# Altium PCB LiPoBattery.PcbDoc
Units mil, origin at the board's own origin, x right, y up, seen from the top; angles counter-clockwise.
Board outline 2662.03 x 2054.69 mil, 2 copper layers (Top Layer, Bottom Layer); 18 components, 9 nets, 54 pads, 12 vias.
Unrouted connection lines stored in the file: 12.
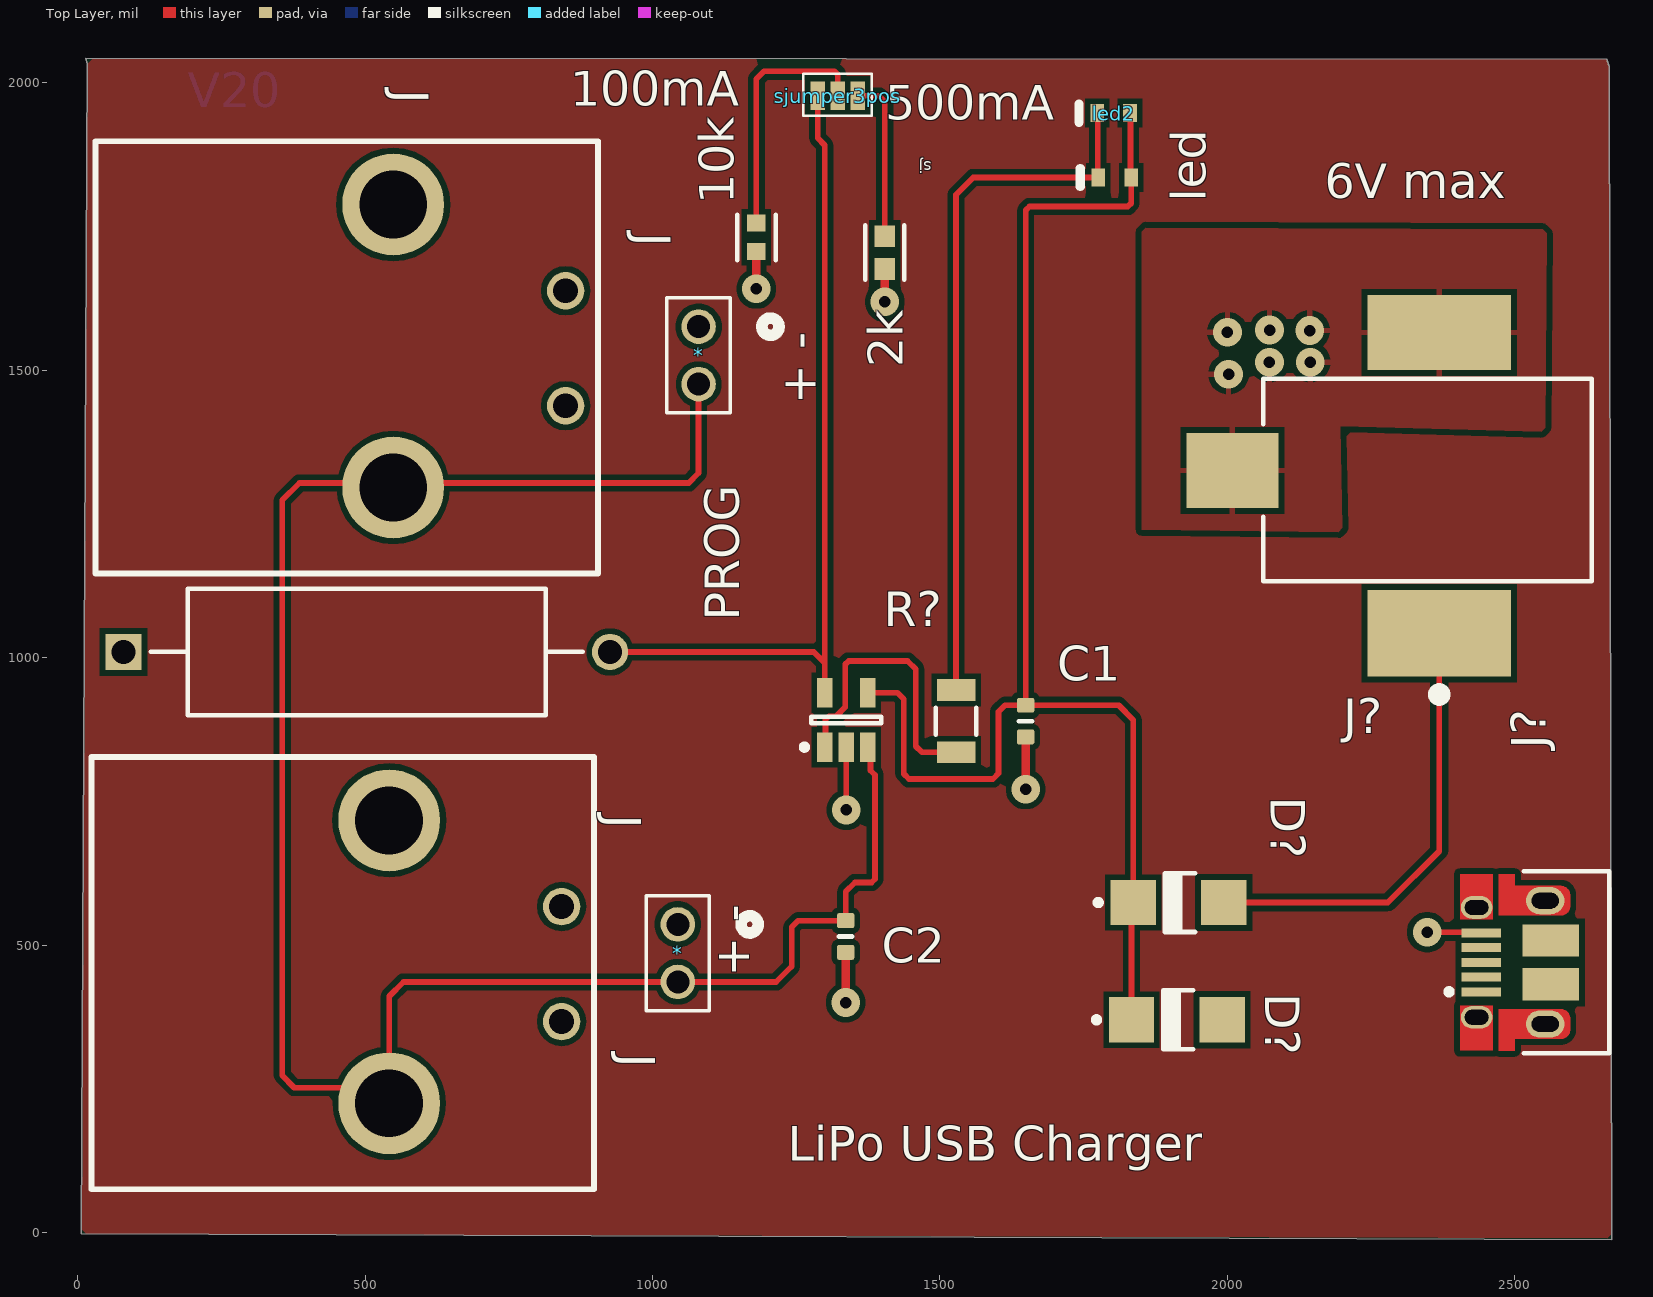
[diagram p0: Top Layer view]
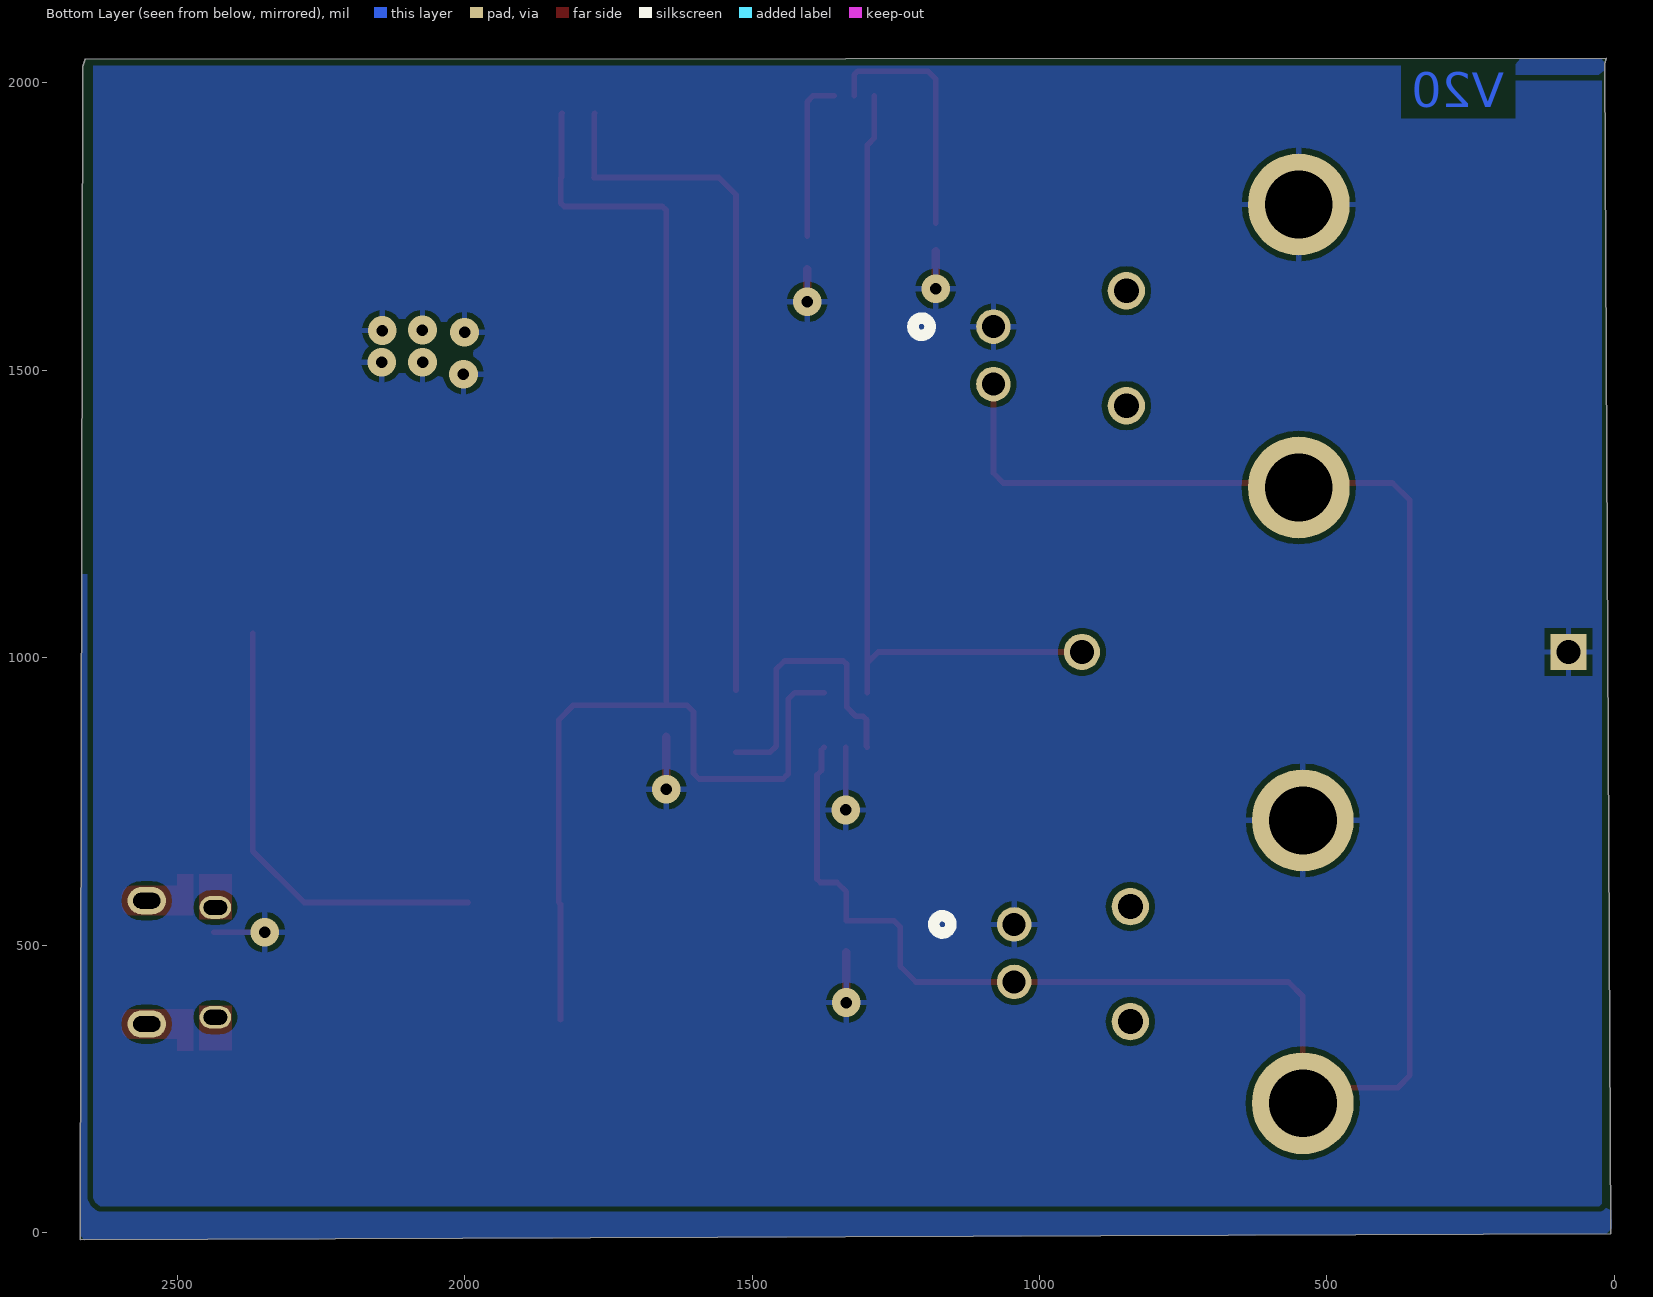
[diagram p1: Bottom Layer view, seen from below]
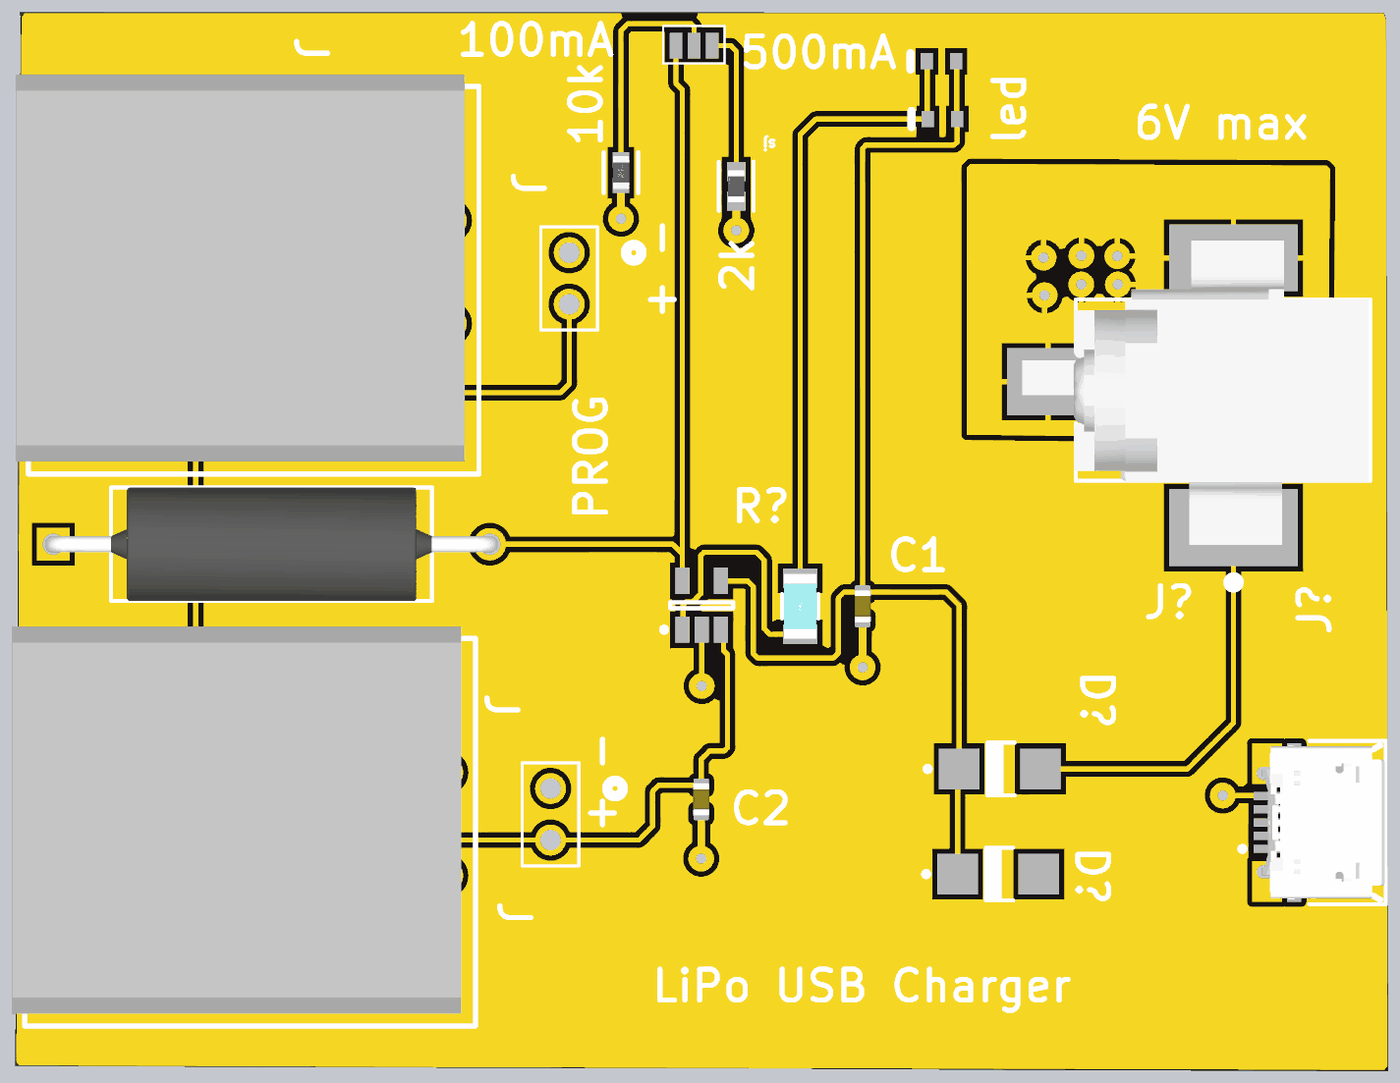
[diagram p2: 3D render of the assembled board from above, using the file's embedded part models]

## Layer stack, top to bottom
Top Solder: solder mask 0.4, Solder Resist, Dk 3.5
Top Layer: signal copper 1.4
Dielectric 1: dielectric 12.6, FR-4, Dk 4.8
Bottom Layer: signal copper 1.4
Bottom Solder: solder mask 0.4, Solder Resist, Dk 3.5

## Board outline
6.04,-2.13 2668.07,-12.53 2663.82,2028.39 2659.88,2041.18 14.21,2042.17 16.48,2033.31

## Design rules (kind name [scope] priority, off if disabled: settings)
Clearance [All] p1: gap=10 ignorepadtopadclearanceinfootprint=TRUE
HoleSize [All] p1: absolutevalues=TRUE maxlimit=150 minlimit=1 maxpercent=80.000 minpercent=20.000
MinimumSolderMaskSliver [All] p1: minsoldermaskwidth=0.5
PolygonConnect [All] p1: connectstyle=Relief reliefconductorwidth=10 reliefentries=4 polygonreliefangle="90 Angle" airgapwidth=10
RoutingVias [All] p1: holewidth=20 width=50 viastyle="Through Hole" minholewidth=10 minwidth=50 maxholewidth=30 maxwidth=50
SilkToSolderMaskClearance [IsPad] p1: minsilkscreentomaskgap=7 clearancetoexposedcopper=TRUE
SolderMaskExpansion [All] p1: expansion=4 istentingtop=FALSE
SupplyNets "Schematic Supply Nets" [InNet('GND')] p1: voltage=0.000
Width [All] p1: maxlimit=20 minlimit=10 preferedwidth=10 checkconnectedcopper=TRUE
27 further rules are at their usual default settings.

## Components (designator, comment, footprint, x,y, rotation, side; value= is the part's Value field where it differs from the comment)
2k "CR0603-JW-202GLF" FP-CR0603-IPC_B 1403.98,1704.49 r90 top
10k "CRGP0603F10K" FP-CRGP0603-IPC_C 1180.55,1731.06 r90 top value=10KΩ
* "2 PIN HEADER" "PCBComponent_1 - duplicate" 1448.17,638.4 r180 top
* "2 PIN HEADER" "PCBComponent_1 - duplicate" 1484.33,1678.03 r180 top
C1 "Capacitor 4.7µF +/-20% 10V 0603" CAPC0603(1608)100_L 1649.06,889.61 r270 top value=4.7µF
C2 "Capacitor 4.7µF +/-20% 10V 0603" CAPC0603(1608)100_L 1336,515 r270 top value=4.7µF
D? "MBRA140T3G" ONSC-SMA-2-403D-02_V 1912,370 r0 top
D? "MBRA140T3G" ONSC-SMA-2-403D-02_V 1915,574 r0 top
J "1-179276-2" PCBComponent_1 542,717 r270 top
J "1-179276-2" PCBComponent_1 549,1788.13 r270 top
J? "10103594-0001LF" FCI-10103594-0001LF_V 2498,470 r90 top
J? "RASM722X" SWIT-RASM722X_V 2188.43,1303.98 r90 top locked
led "red" VISH-TLMX1100_V 1804,1835 r180 top
led2 "red" VISH-TLMX1100_V 1802,1947 r180 top
PROG "CW02B8K200JE12" FP-CW02B-MFG 503,1010 r0 top
R? "RK73H2B3300FT" FP-RK73H2B-IPC_C 1527.99,889.61 r270 top
sjumper3pos "sjumper3pos-Symbol-1" "PCBComponent_1 - duplicate2" 1322.28,1977.2 r180 top
? "MCP73811T-420I/OT" SOT-23-OT5_M 1337.05,891.57 r90 top

## Footprints (in the part's own frame and the unit in brackets; to place one, negate y for a bottom-side part, rotate by r counter-clockwise, add the part's x,y. Pads: shape width x height; smd on the part's side, far side on the other; paste and mask are expansions set on the pad)
CAPC0603(1608)100_L [mm] "Chip Capacitor, Body 1.6x0.8mm, Height 1.0mm, IPC High Density"
  rrect25% 0.66x0.76 smd: 1(-0.7,0) 2(0.7,0)
  silkscreen extent 0,-0.3 0,0.3, body extent -0.8,-0.4 0.8,0.4, height 0.95
FCI-10103594-0001LF_V [mm] "SMD, 5-Leads, Body 8.04x5.62mm, Pitch 0.65 mm"
  rect 0.4x1.75 smd: 1(-1.3,1.435) 2(-0.65,1.435) 3(0,1.435) 4(0.65,1.435) 5(1.3,1.435)
  oval 1x1.4 hole 0.65 slot 1.05 at 90 deg: 6(-2.425,1.64) 7(2.425,1.64)
  oval 1.2x1.7 hole 0.7 slot 1.2 at 90 deg: 8(2.725,-1.39) 9(-2.725,-1.39)
  rect 1.425x2.5 smd: 10(-0.962,-1.64) 11(0.962,-1.64)
  Top Layer region: 3.9,2.37 1.9,2.37 1.9,0.91 3.9,0.91
  Top Layer region: -3.9,0.91 -1.9,0.91 -1.9,2.37 -3.9,2.37
  Top Layer region: 3.375,-0.04 3.375,-2.09 3.373,-2.129 3.369,-2.167 3.365,-2.185 3.359,-2.203 3.348,-2.239 3.329,-2.277 3.308,-2.312 3.284,-2.344 3.258,-2.374 3.227,-2.401 3.194,-2.426 3.158,-2.446 3.121,-2.464 3.08,-2.477 3.049,-2.483 3.012,-2.488 2.975,-2.49 2.475,-2.49 2.432,-2.488 2.391,-2.481 2.351,-2.471 2.312,-2.456 2.28,-2.439 2.249,-2.421 2.217,-2.396 2.19,-2.37 2.164,-2.342 2.143,-2.312 2.121,-2.277 2.105,-2.241 2.093,-2.209 2.088,-2.192 2.084,-2.175 2.08,-2.155 2.076,-2.134 2.075,-2.112 2.075,-2.09 2.075,-0.04 2.075,0.66 3.9,0.66 3.9,-0.04
  Top Layer region: -3.375,-0.04 -3.375,-2.09 -3.373,-2.129 -3.369,-2.167 -3.365,-2.185 -3.359,-2.203 -3.348,-2.239 -3.329,-2.277 -3.308,-2.312 -3.284,-2.344 -3.258,-2.374 -3.227,-2.401 -3.194,-2.426 -3.158,-2.446 -3.121,-2.464 -3.08,-2.477 -3.049,-2.483 -3.012,-2.488 -2.975,-2.49 -2.475,-2.49 -2.432,-2.488 -2.391,-2.482 -2.351,-2.471 -2.312,-2.456 -2.28,-2.439 -2.249,-2.421 -2.217,-2.397 -2.19,-2.37 -2.164,-2.342 -2.143,-2.312 -2.121,-2.277 -2.105,-2.241 -2.093,-2.209 -2.088,-2.192 -2.084,-2.175 -2.08,-2.155 -2.076,-2.134 -2.075,-2.112 -2.075,-2.09 -2.075,-0.04 -2.075,0.66 -3.9,0.66 -3.9,-0.04
  silkscreen extent -4.02,-4.21 4.02,2.98, body extent -4.02,-4.15 4.02,1.88, height 2.9
FP-CR0603-IPC_B [mil]
  rect 37.72x35.91 smd paste+0 mask+0: 1(-28.62,0) 2(28.62,0)
  silkscreen extent -47,-34 47,34, body extent -57,-28 57,28, height 10
FP-CRGP0603-IPC_C [mil]
  rect 29.85x31.97 smd paste+0 mask+0: 1(-24.68,0) 2(24.68,0)
  silkscreen extent -40,-33 40,33, body extent -44,-22 44,22, height 10
FP-CW02B-MFG [mm]
  rect 1.6x1.6 hole 1.05 paste-2539.97 mask+0: 1(-10.751,0)
  round 1.6 hole 1.05 paste-2539.97 mask+0: 2(10.751,0)
  silkscreen extent -9.55,-2.8 9.55,2.8, body extent -11.65,-2.9 11.65,2.9, height 0.25
FP-RK73H2B-IPC_C [mil]
  rect 37.61x67.17 smd paste+0 mask+0: 1(-54.15,0) 2(54.15,0)
  silkscreen extent -24,-35 24,35, body extent -77,-39 77,39, height 10
ONSC-SMA-2-403D-02_V [mm] "Molded, 2-Leads, Body 4.57x2.92mm"
  rect 2x2 smd: 1(-2,0) 2(2,0)
  silkscreen extent -3.67,-1.3 0.74,1.3, body extent -2.16,-1.3 2.16,1.3, height 2.2
PCBComponent_1 [mm]
  round 4.5 hole 3: 1(0,0) 2(12.5,0)
  round 1.65 hole 1.1: ""(3.81,7.62) ""(8.89,7.62)
  silkscreen extent -2.8,-13.15 16.3,9.05, body extent -3.39,-13.75 15.69,8.35, height 10.86
"PCBComponent_1 - duplicate" [mil]
  round 60 hole 40 paste-99999 mask+0: 1(404.17,102.4) 2(404.17,202.4)
  silkscreen extent 264,52 459,252
"PCBComponent_1 - duplicate2" [mil]
  rect 25x50 smd: 1(-35,0) 2(0,0) 3(35,0)
  silkscreen extent -59,-38 60,34
SOT-23-OT5_M [mm] "SOT23, 5-Leads, Body 2.9x1.7mm, Pitch 0.95mm, Lead Span 2.8mm, IPC Low Density"
  rect 1.3x0.7 smd: 1(-1.2,0.95) 2(-1.2,0) 3(-1.2,-0.95) 4(1.2,-0.95) 5(1.2,0.95)
  silkscreen extent -1.32,-1.55 0.15,1.97, body extent -0.9,-1.55 0.9,1.55, height 1.45
SWIT-RASM722X_V [mm] "SMD, 3-Leads, Body 14.5x9mm"
  rect 3.81x6.35 smd: 1(-6.645,-4.57)
  rect 3.3x4.06 smd: 2(0.545,4.57)
  rect 3.3x6.35 smd: 3(6.645,-4.57)
  silkscreen extent -9.6,-11.3 4.59,3.2, body extent -7.5,-11.23 7.5,5.84, height 11.1
VISH-TLMX1100_V [mm] "SMD, 2-Leads, Body 1.6x0.8mm"
  rect 0.6x0.8 smd: 1(-0.725,0) 2(0.725,0)
  silkscreen extent 1.53,-0.4 1.53,0.4, body extent -0.8,-0.4 0.8,0.4, height 0.65

## Part data
2k: library part CMP-07231-005094-1, "Thick Film Chip Resistors 0603 2kΩ 0.1W 5% 200ppm/°C", Case Code (Imperial)=0603, Case Code (Metric)=1608, Max Operating Temperature=155°C, Max Power Dissipation=100mW, Min Operating Temperature=-55°C, Package Quantity=10000, Resistance=2kR, Temperature Coefficient=200ppm/°C, Tolerance=5%, Voltage Rating=50V, Case/Package=0603, Composition="Thick Film", Depth=0.8mm, Features="Moisture Resistant", Height=0.022inch, Length=0.063inch, Military Standard=Not, Mount="Surface Mount", Number of Terminations=2, Packaging="Tape and Reel", Power Rating=100mW, Termination=SMD/SMT, Thickness=457um, Width=0.031inch
10k: library part CMP-03211-004414-1, "CRGP 0603 10K 1%", Ambient Temperature Range High=+70°C, Manufacturer=TE, Package=CRGP0603, Power Rating=0.25W, Resistance=10KΩ, Temperature="-55°C to +155°C", Temperature Coefficient=±100ppm/°C, Temperature Range High=+155°C, Temperature Range Low=-55°C, Tolerance=0.01, Voltage Rating=50V, Automotive=No, Category=Res, ComponentLink2Description=Datasheet, ComponentLink2URL=https://www.te.com/commerce/DocumentDelivery/DDEController?Action=srchrtrv&DocNm=9-1773463-9&DocType=DS&DocLang=English, Composition="Thick Film", Device Class L1="Passive Components", Device Class L2=Resistors, Device Class L3="Chip SMD Resistors", Digikey Description="CRGP 0603 10K 1%", Height=0.55mm, Ipc Land Pattern Name=RESC16080X45, Lead Free=Yes, Manufacturer Part Number=CRGP0603F10K, Mouser Description="Res, 10K, 1%, 0.25W, 0603, Thick Film", Octopart=https://octopart.com/crgp0603f10k-te+connectivity-91018721, RoHS=TRUE, Series=CRGP
C1 C2: library part CMP-001-00076-4, "Chip Capacitor, 4.7µF +/-20%, 10V, 0603, Thickness 1 mm", Case/Package=0603, Max Operating Temperature=85°C, Min Operating Temperature=-55°C, Tolerance=10%, Voltage Rating=10V, Mounting Technology=SMT, Pins=2
D? D?: library part CMP-1055-00320-1, "Schottky Power Rectifier, 2-Pin SMA, Pb-Free, Tape and Reel", Manufacturer="On Semiconductor", ComponentLink1Description="Manufacturer URL", ComponentLink1URL=http://www.onsemi.com/, ComponentLink2Description=Datasheet, ComponentLink2URL=http://www.onsemi.cn/pub_link/Collateral/MBRA140T3-D.PDF, ComponentLink3Description="Package Specification", ComponentLink3URL=http://www.onsemi.com/pub_link/Collateral/403D-02.PDF, Configuration=Single, DatasheetVersion="Rev. 10", IFSM Max (A)=30, Mounting Technology="Surface Mount", PackageDescription="2-Pin Small Molded Package, J-Bend Lead, Body 2.605 x 4.315 mm", PackageReference=SMA-2-403D-02, PackageVersion="Rev. G, 07/2012", Packing="Tape and Reel", PartNumber=MBRA140T3G, RoHS=TRUE
J J: "Dynamic 3000, 5.08MM Pitch 2 -way, 1 Row Right Angle Pcb Header, Solder Term", Color=Black, Contact Current Rating=15A, Flammability Rating="UL94 V-0", Insulation Resistance=100MΩ, Manufacturer="TE Connectivity", Manufacturer Lifecycle Status=ACTIVE, Max Operating Temperature=105°C, Max Voltage Rating (AC)=600V, Min Operating Temperature=-55°C, Operating Force=4.8928N, Approvals=UL, Category="Headers and Wire Housings", China RoHS=Compliant, ComponentLink1Description=https://datasheet.octopart.com:443/1-179276-2-TE-Connectivity-datasheet-179899453.pdf?src-supplier=IHS, ComponentLink1URL=https://datasheet.octopart.com:443/1-179276-2-TE-Connectivity-datasheet-179899453.pdf?src-supplier=IHS, ComponentLink2Description=https://sigma.octopart.com:443/15059836/technical_drawing/TE-Connectivity-1-179276-2.pdf?src-supplier=Farnell, ComponentLink2URL=https://sigma.octopart.com:443/15059836/technical_drawing/TE-Connectivity-1-179276-2.pdf?src-supplier=Farnell, ComponentLink3Description=https://datasheet.octopart.com:443/1-179276-2-TE-Connectivity-datasheet-42633666.pdf?src-supplier=Master+Electronics, ComponentLink3URL=https://datasheet.octopart.com:443/1-179276-2-TE-Connectivity-datasheet-42633666.pdf?src-supplier=Master+Electronics, ComponentLink4Description=https://datasheet.octopart.com:443/1-179276-2-TE-Connectivity---AMP-datasheet-181563238.pdf?src-supplier=Master+Electronics, ComponentLink4URL=https://datasheet.octopart.com:443/1-179276-2-TE-Connectivity---AMP-datasheet-181563238.pdf?src-supplier=Master+Electronics, ComponentLink5Description=https://datasheet.octopart.com:443/1-179276-2-TE-Connectivity-datasheet-11077907.pdf?src-supplier=Electro+Sonic, ComponentLink5URL=https://datasheet.octopart.com:443/1-179276-2-TE-Connectivity-datasheet-11077907.pdf?src-supplier=Electro+Sonic, ComponentLink6Description=https://datasheet.octopart.com:443/1-179276-2-TE-Connectivity-datasheet-155826164.pdf?src-supplier=TE+Connectivity, ComponentLink6URL=https://datasheet.octopart.com:443/1-179276-2-TE-Connectivity-datasheet-155826164.pdf?src-supplier=TE+Connectivity, ComponentLink7Description=https://datasheet.octopart.com:443/1-179276-2-Agastat-datasheet-15059020.pdf?src-supplier=TE+Connectivity, ComponentLink7URL=https://datasheet.octopart.com:443/1-179276-2-Agastat-datasheet-15059020.pdf?src-supplier=TE+Connectivity, ComponentLink8Description=https://datasheet.octopart.com:443/1-179276-2-Agastat-datasheet-15028295.pdf?src-supplier=TE+Connectivity, ComponentLink8URL=https://datasheet.octopart.com:443/1-179276-2-Agastat-datasheet-15028295.pdf?src-supplier=TE+Connectivity, ComponentLink9Description=https://datasheet.octopart.com:443/1-179276-2-AMP-datasheet-176864351.pdf?src-supplier=Burklin+Elektronik, ComponentLink9URL=https://datasheet.octopart.com:443/1-179276-2-AMP-datasheet-176864351.pdf?src-supplier=Burklin+Elektronik, ComponentLink10Description=https://datasheet.octopart.com:443/1-179276-2-TE-Connectivity-datasheet-101747747.pdf?src-supplier=Future+Electronics, ComponentLink10URL=https://datasheet.octopart.com:443/1-179276-2-TE-Connectivity-datasheet-101747747.pdf?src-supplier=Future+Electronics, ComponentLink11Description=https://datasheet.octopart.com:443/1-179276-2-TE-Connectivity-datasheet-111024656.pdf?src-supplier=RS+(Formerly+Allied+Electronics), ComponentLink11URL=https://datasheet.octopart.com:443/1-179276-2-TE-Connectivity-datasheet-111024656.pdf?src-supplier=RS+(Formerly+Allied+Electronics), ComponentLink12Description=http://sigma.octopart.com:80/38771343/materials_sheet/TE-Connectivity-1-179276-2.pdf?src-supplier=Compliance+Statements, ComponentLink12URL=http://sigma.octopart.com:80/38771343/materials_sheet/TE-Connectivity-1-179276-2.pdf?src-supplier=Compliance+Statements, ComponentLink13Description=http://sigma.octopart.com:80/136662181/materials_sheet/TE-Connectivity-1-179276-2.pdf?src-supplier=Compliance+Statements, ComponentLink13URL=http://sigma.octopart.com:80/136662181/materials_sheet/TE-Connectivity-1-179276-2.pdf?src-supplier=Compliance+Statements, ComponentLink14Description=http://sigma.octopart.com:80/15059835/rohs_certificate/Agastat-1-179276-2.pdf?src-supplier=Compliance+Statements, ComponentLink14URL=http://sigma.octopart.com:80/15059835/rohs_certificate/Agastat-1-179276-2.pdf?src-supplier=Compliance+Statements, Connector System=Wire-to-Board, Connector Type="Header, Plug, Tab", Contact Gender=Male, Contact Material="Gold, Nickel", Contact Plating="Gold, Tin", Contact Retention=Without, Current Rating=15A, Depth=22.1mm, ELV=Compliant, Export Control Classification Number (ECCN) Code=EAR99, Gender=Male, Halogen Free="Halogen Free", Harmonized Tariff Schedule (HTS) Code=8536.69.40.30, Height=11.25mm, Housing Color=Black, Housing Material=Nylon, Introduction Date=1997-09-06, Lead Free="Lead Free", Length=19.0754mm, Lifecycle Status=Production, Manufacturer Part Number=1-179276-2, Mating Alignment=With, Mating Retention=With, Mounting Technology="Through Hole", Number of Contacts=2, Number of Ports=1, Number of Positions=2, Number of Rows=1, Number of Terminals=2, Operating Supply Voltage=600V, Orientation="Right Angle", Packaging=Bulk, PCB Mount Retention=With, PCB Mounting Orientation="Right Angle", PCB Thickness=1.6002mm, Pins=2, Pitch=5.08mm, Plating Thickness=381nm, Preloaded=Yes, Pricing="1=2.1052, 26=1.6722, 104=1.5164, 520=1.3535, 1014=1.2943 (USD)", Radiation Hardening=No, REACH SVHC=Yes, RoHS=Compliant, Sealable=No, Shielding=Unshielded, Stock=4048, Supplier="Arrow Electronics", Supplier Part Number=1-179276-2, Tail Length=3.8mm, Terminal Pitch=5.08mm, Termination=Solder, VDE Tested=No, Voltage Rating=600V, Width=22.098mm
J?: library part CMP-002-00038-2, "Micro USB 2.0 B Receptacle, 5 Position, Height 3.24 mm, -55 to 85 degC, RoHS, Tape and Reel", Case/Package=FCI-10103594-0001LF, Current Rating=1.8A, Manufacturer="FCI Electronics", Max Operating Temperature=85°C, Min Operating Temperature=-55°C, Package Description="5-Pin Surface Mount Device, Body 8.04 x 5.62 mm", Package Quantity=1500, Voltage Rating=100V, Connector Type=USB, Contact Material=Copper, Contact Plating=Gold, Datasheet URL=http://portal.fciconnect.com/Comergent//fci/drawing/10103594.pdf, Datasheet Version="Rev. A, 06/2010", Gender=Female, Lead Pitch=0.65mm, Manufacturer URL=http://portal.fciconnect.com/, Mounting Technology=SM, Package Reference=FCI-10103594-0001LF, Packaging=TapeandReel, Pins=5, RoHS Compliant=True
J?: library part CMP-002-00013-2, "Power Jack, 5 A, 250 V, 3-Pin SMD, RoHS, Bulk", Manufacturer=Switchcraft, Package Description="3-Pin Surface Mount Device, Body 14.5 x 9 mm", Case/Package=RASM722X, Connector Type=DCJack, Datasheet URL=http://www.switchcraft.com/Drawings/rasm732x_cd.pdf, Datasheet Version="Rev. A, 09/2005", Manufacturer URL=http://www.switchcraft.com/, Mounting Technology=SM, Package Reference=RASM722X, RoHS Compliant=Unknown
led led2: library part CMP-007-00030-2, "Red Led, 20mA, 2.1 V, -40 to 100 degC, 2-Pin SMD (0603), RoHS, Tape and Reel", Case/Package=0603, Colour=Red, Forward Current=20mA, Forward Voltage=2.1V, Manufacturer="Vishay Semiconductor", Max Operating Temperature=100°C, Min Operating Temperature=-40°C, Package Description="2-Pin Surface Mount Device, Body 1.6 x 0.8 mm", Package Quantity=3000, Package Reference=TLMX1100, Power=90mW, Datasheet URL=http://www.vishay.com/docs/83173/tlmb1100.pdf, Datasheet Version="Rev. 2.7, 03/2016", Illumination Colour=Red, Lens Style=Clear, Luminous Intensity=63mcd, Manufacturer URL=http://www.vishay.com/, Mounting Technology=SM, Nominal Vf=2.1V, Packaging=TapeandReel, Pins=2, RoHS Compliant=True, Viewing Angle=160degrees
PROG: library part CMP-02408-000032-1, "RES 8.2K OHM 3.75W 5% AXIAL", Case/Package=Conformal, Max Operating Temperature=250°C, Min Operating Temperature=-65°C, Package Quantity=100, Power Rating=3W, Resistance=8.2kR, Resistor Type=Wirewound, Temperature Coefficient=30ppm/°C, Tolerance=5%, Contact Plating=Tin, Diameter=4.78mm, Lead Diameter=0.813mm, Length=15.8mm, Mount="Through Hole", Packaging=Bulk, RoHS Compliant=Yes, Series=CW, Technology="WIRE WOUND", Termination=Axial
R?: library part CMP-04015-094855-1, "330Ω ±1% 0.25W Chip Resistor 1206 Thick Film AEC-Q200 Qualified"
?: library part CMP-0133-00139-1, "Simple, Miniature Single-Cell, Fully Integrated Li-Ion/Li-Polymer Charge Management Controller, 4.2V, 5-Pin SOT-23, Industrial Temperature, Tape and Reel", Code_IPC=SOT23-5, DatasheetVersion="revB, Sep-2007", PackageDescription="5-Lead Plastic Small Outline Transistor (OT) [SOT-23]", PackageReference=SOT-23-OT5, PackageVersion="revBB, Aug-2009"

## Via types
v1: diameter 50, hole 20, Top Layer to Bottom Layer, 12 vias

## Nets (pads, with @x,y where several pads share a name; then routed paths per layer and width w, separated by ;. In a path a pad name is that pad's centre, name@x,y a point inside that pad or via, vN(x,y) a via of type N, cw(c..) or ccw(c..) an arc to the next point about the centre after c; other vN are vias at no path point)
GND: 2k.1 10k.1 *.1 ?.2 C1.2 C2.2 J.1 J?.2@2008.5,1325.43 J?.3@2368.35,1565.59 J?.5 PROG.1 | length 510.1
  Top Layer w10: v1(1337.05,735.05) ?.2 ; v1(2347.52,522.48) J?.5@2436.46,522.48
  Top Layer w15: v1(1180.55,1641.57) 10k.1 ; v1(1336,400) C2.2 ; v1(1403.98,1618.94) 2k.1 ; v1@1649,771 v1(1649.06,771.06) C1.2
  Bottom Layer w15: J.1@549,1788.13 J.1@557.21,1779.92
  other v1: 2002,1493 2073,1514 2144,1514 2000,1566 2143,1569 2073.27,1569.72
Net2k_2: 2k.2 sjumper3pos.1 | length 284.8
  Top Layer w10: sjumper3pos.1 1393.8,1977.2 1403.98,1967.02 2k.2
Net10k_2: 10k.2 sjumper3pos.2 | length 437.5
  Top Layer w10: 10k.2 1180.55,2006.55 1194,2020 1316.43,2020 1322.28,2014.14 sjumper3pos.2
Net*_2: *.2 ?.3 C2.1 J.2 | length 3559.3
  Top Layer w10: J.2@542,224.87 542,411 567,436 1044,436 1215,436 1242,463 1242,531 1253.56,542.56 C2.1 1336,593 1352,609 1381.14,609 1387,614.86 1387,796 1379.26,803.74 1379.26,839.52 ?.3 ; J.2@587.84,252 377,252 356,273 356,1274 385.98,1303.98 1062.98,1303.98 1080.16,1321.16 *.2@1080.16,1475.63
Net_1: ?.1 R?.2 | length 505.8
  Top Layer w10: ?.1 1301,845.69 1301,892.37 1306.86,898.23 1319.64,898.23 1335.32,913.91 1335.32,988.46 1341.18,994.32 1443.68,994.32 1458,980 1458,846 1468.55,835.45 R?.2
Net_4: ?.4 C1.1 D?.1 led2.1 led.1 | length 2456.2
  Top Layer w10: ?.4 1426.18,938.82 1437,928 1437,798 1446,789 1592,789 1602,799 1602,906 1613.17,917.17 C1.1 ; led2.1 1831.54,1946 1831.54,1836 led.1 1832.54,1790.4 1826.69,1784.54 1655.54,1784.54 1649.06,1778.06 C1.1 ; D?.1@1833.26,370 1833.26,571 1836.26,574 1836.26,891.74 1810.83,917.17 C1.1
Net_5: ?.5 PROG.2 sjumper3pos.3 | length 1424.7
  Top Layer w10: PROG.2 1280.65,1010 1299.65,991 ; sjumper3pos.3 1287.28,1903.72 1299.65,1891.35 1299.65,991 ; ?.5 1299.65,991
NetD?_2: D?.2@1993.74,574 J?.1@2368.35,1042.36 | length 790.6
  Top Layer w10: D?.2@1993.74,574 2279,574 2368.35,663.35 J?.1@2368.35,1042.36
Netled2_2: led2.2 led.2 R?.1 | length 1234
  Top Layer w10: R?.1 1527.99,1804.99 1558,1835 led.2 1774.46,1836 1774.46,1946 led2.2
pads on no net: D?.2@1990.74,370 J. J?.1@2441.5,418.82 J?.2@2441.5,444.41 J?.3@2441.5,470 J?.4 J?.6 J?.7 J?.8 J?.9 J?.10 J?.11

## Polygon pours and split planes (outlines as drawn)
no net on Top Layer "NONET_L01_P004" (solid, pour order 4): 16,2041 2659,2041 2664,2027 2668,-10 8,-2 18,2033 14,2043
GND on Top Layer "GND_L01_P002" (solid, pour order 2): 1850.83,1747.87 2555.55,1744.92 2552.6,1392.56 2196.3,1402.4 2200.24,1218.35 1850.83,1222.28
no net on Top Solder "NONET_L01_P003" (solid, pour order 3): 14,2042 16,2040 2660,2040 2660,2041 2659,2042 cw(c2646.93,2029.93) 2664,2029.93 2664,884.83 ccw(c2670.83,884.83) 2666,880 2666,-11 1926,-11 1926,-9 1451,-9 1451,-7 7,-1 16,2033
no net on Bottom Layer "NONET_L02_P006" (solid, pour order 6): 6,-2 2668,-13 2665,2029 2660,2043 14,2042 17,2033 5,0
GND on Bottom Layer "GND_L02_P000" (solid, pour order 0): 2645.12,48.07 2643.15,46.1 26.02,46.1 22.09,50.04 22.09,2003.78 178.58,2003.78 178.58,2029.37 2646.1,2029.37 2646.1,52.01 2641.18,52.01
no net on Bottom Solder "NONET_L02_P005" (solid, pour order 5): 16,2045 2656,2043 2664,2032 2667,-10 6,-1 17,2030 14,2038 15,2044

## Other copper
Bottom Layer:
  text "V20" at 192,1957 h60

## Silkscreen, mask and mechanical layers (free items; w line width, h text height)
Top Overlay:
  text "100mA" at 857,1960 h60
  text "500mA" at 1405,1936 h60
  text "6V max" at 2169,1799 h60
  text "+ -" at 1284,1441 h60 r90
  text "+ -" at 1168,445 h60 r90
  text "LiPo USB Charger" at 1235,124.99 h60
Mechanical 15:
  the board outline again, w3.94

## Text inside footprints (layer, text, board x,y; h text height)
J?: Mechanical 1 "PCB Edge" at 2609.42,644.21 h29.53 r90
sjumper3pos: Top Overlay "sj" at 1486,1863 h20 r180